# EAGLE board IR remote 2.1 (EAGLE 7.3.0)
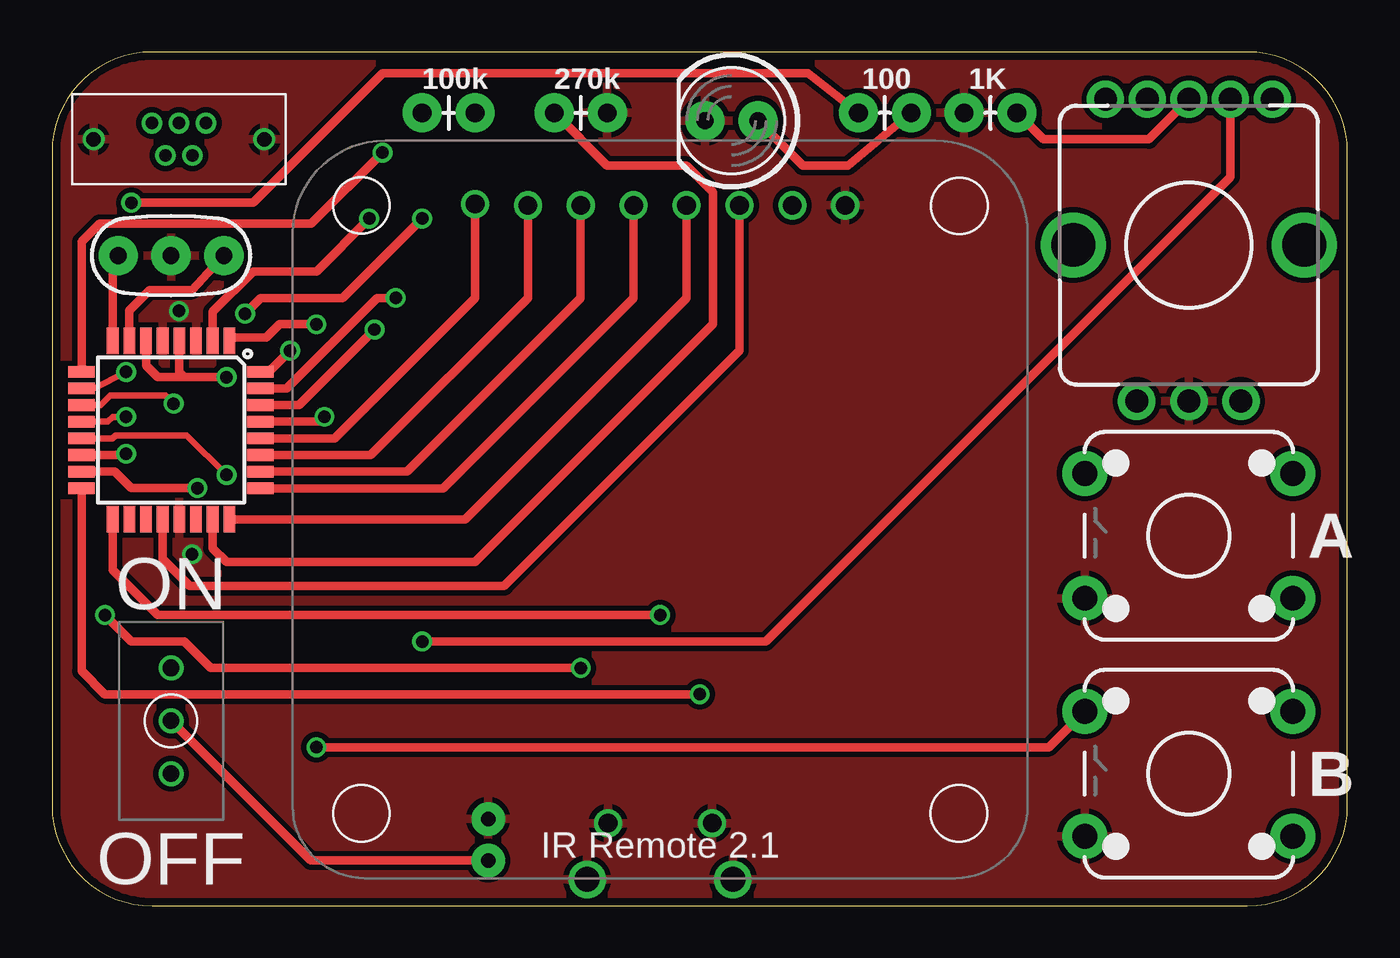
[diagram p0: board, top side]
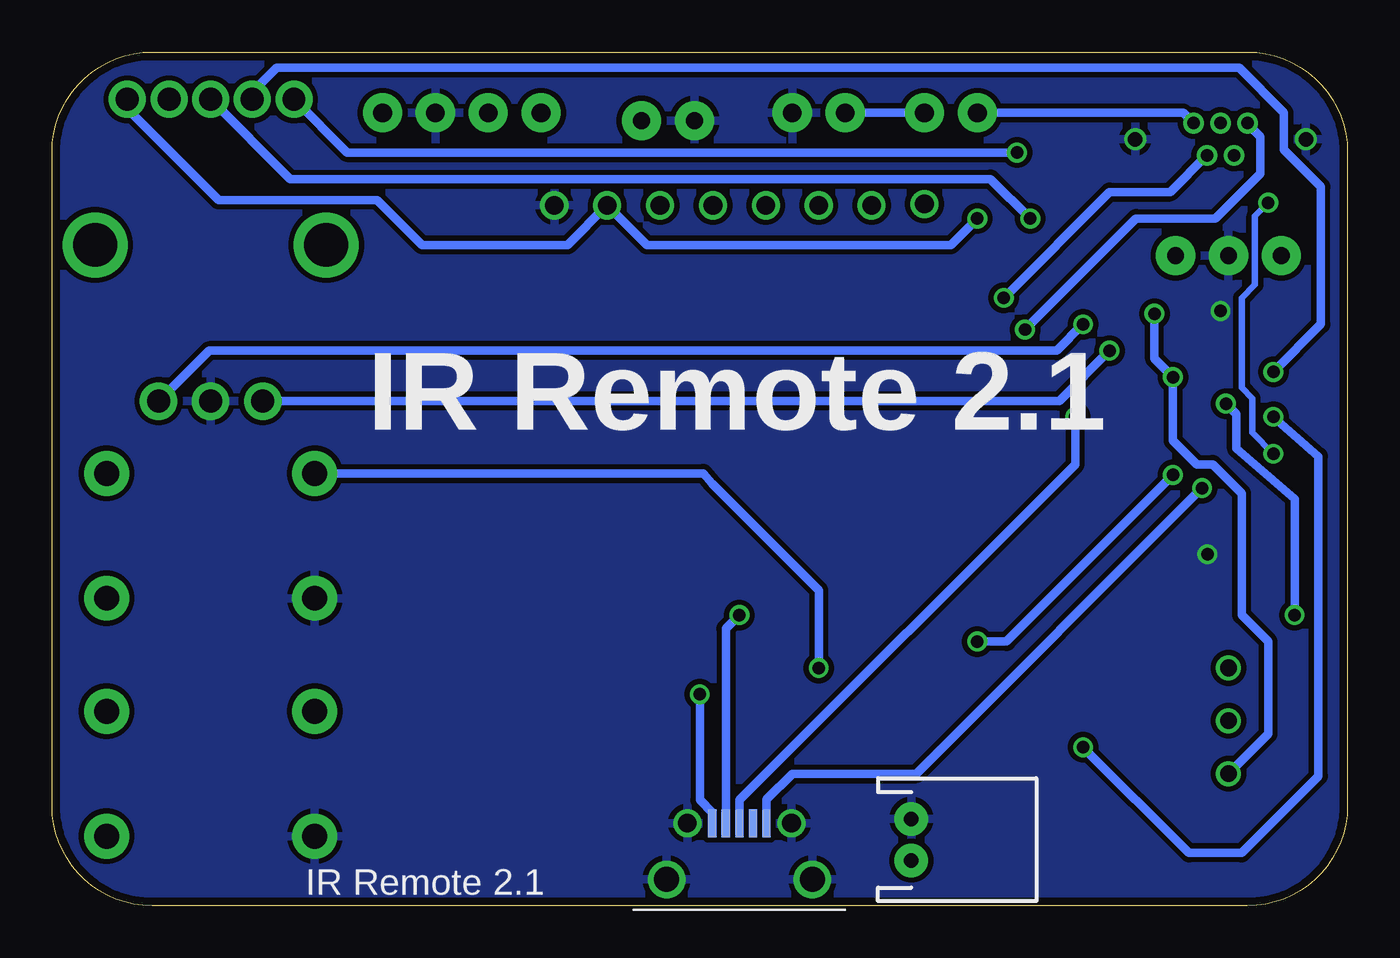
[diagram p1: board, bottom side, seen from below]

Size 62.23 x 41.02 mm. Coordinates in mm from the lower left corner, seen from the top.
Outline: 4.8,0 57.43,0 arc90 62.23,4.8 62.23,36.22 arc90 57.43,41.02 4.8,41.02 arc90 0,36.22 0,4.8 arc90 4.8,0
Copper layers (1*16): Top 0.0356mm / dielectric 1.5011mm / Bottom 0.0356mm
Design rules "LaenPCBOrder": minimum track width 6mil, minimum drill 13mil, track to track 6mil, track to pad 6mil, pad to pad 6mil, via to via 6mil, smd to smd 6mil, copper to edge 15mil, drill to drill 6mil, minimum pad ring 7mil, minimum via ring 7mil, stop-mask expansion 3mil, vias tented up to drill 0mil, thermal gap 10mil
Net classes: 0 default: clearance 0.254 mm

## Footprints (pad centres in the part's own frame; a part is rotated, then mirrored left to right if it is on the bottom)
USB_HORZ_REINFORCED_MICRO = drill 1.2: G1 -3.5,0; G2 3.5,0 | smd 0.4 x 1.35: P1 -1.3,2.7; P2 -0.65,2.7; P3 0,2.7; P4 0.65,2.7; P5 1.3,2.7 | drill 0.9: P$1 -2.5,2.7; P$2 2.5,2.7
JST-2-PTH = drill 0.7 pad 1.6: 1 -1,0; 2 1,0
LED5MM-KIT = drill 0.813 pad 1.88: A -1.27,0; K 1.27,0
MICRO-B-TH = drill 0.6 pad 1: 1 -1.3,-0.775; 2 -0.65,0.775; 3 0,-0.775; 4 0.65,0.775; 5 1.3,-0.775 | drill 0.7: P$1 -4.1,0; P$2 4.1,0
AXIAL-0.1 = drill 0.9 pad 1.88: P$1 0,0; P$2 2.54,0
TACTILE-PTH-12MM = drill 1.2 pad 2.159: 1 5,-3; 2 -5,-3; 3 5,3; 4 -5,3
TOGGLE = drill 0.8: P$1 0,2.54; P$2 0,0; P$3 0,-2.54
ENCODER_LED_3_KIT = drill 1.1 pad 1.778: 1 -4,7; 2 -2,7; 3 0,7; 4 2,7; 5 4,7 | drill 1.1 pad 1.8: A -2.5,-7.5; B 2.5,-7.5; C 0,-7.5 | drill 2.1: M1 -5.55,0; M2 5.55,0
TQFP32-08 = smd 1.27 x 0.559: 1 -4.293,2.8; 2 -4.293,2; 3 -4.293,1.2; 4 -4.293,0.4; 5 -4.293,-0.4; 6 -4.293,-1.2; 7 -4.293,-2; 8 -4.293,-2.8; 17 4.293,-2.8; 18 4.293,-2; 19 4.293,-1.2; 20 4.293,-0.4; 21 4.293,0.4; 22 4.293,1.2; 23 4.293,2; 24 4.293,2.8 | smd 0.559 x 1.27: 9 -2.8,-4.293; 10 -2,-4.293; 11 -1.2,-4.293; 12 -0.4,-4.293; 13 0.4,-4.293; 14 1.2,-4.293; 15 2,-4.293; 16 2.8,-4.293; 25 2.8,4.293; 26 2,4.293; 27 1.2,4.293; 28 0.4,4.293; 29 -0.4,4.293; 30 -1.2,4.293; 31 -2,4.293; 32 -2.8,4.293
OLED_DISPLAY = drill 0.9: 3V3 3.81,14.605; CLK -6.35,14.605; CS 1.27,14.605; DATA -8.89,14.668; DC -3.81,14.605; GND 8.89,14.605; RST -1.27,14.605; VIN 6.35,14.605
RESONATOR-PTH = drill 0.8 pad 1.88: 1 -2.54,0; 2 0,0; 3 2.54,0

## Placement (x,y rotation side)
ICSP_PORT  USB_SOCKET_MICRO_VERTREINFORCED  [USB_HORZ_REINFORCED_MICRO]  29.21,1.27 0 bottom
JP1  [JST-2-PTH]  20.95,3.17 270 bottom
LED1  [LED5MM-KIT]  32.64,37.72 180 top
PARAMETER_MONITOR  USB_MICROB_PLUG-PTH2  [MICRO-B-TH]  6.1,36.83 180 bottom
R1  1K  [AXIAL-0.1]  43.81,38.1 0 top
R2  270k  [AXIAL-0.1]  26.67,38.1 180 top
R3  100k  [AXIAL-0.1]  20.32,38.1 180 top
R5  100  [AXIAL-0.1]  38.73,38.1 0 top
S1  SWITCH-MOMENTARY-2-CLOSED  [TACTILE-PTH-12MM]  54.61,17.78 180 top
S3  SWITCH-MOMENTARY-2-CLOSED  [TACTILE-PTH-12MM]  54.61,6.35 180 top
S4  [TOGGLE]  5.71,8.89 180 top
SW1  [ENCODER_LED_3_KIT]  54.61,31.75 0 top
U2  ATMEGA328P_TQFP  [TQFP32-08]  5.71,22.86 270 top
U$1  OLED_DISPLAY  [OLED_DISPLAY]  29.21,19.05 0 top
Y1  [RESONATOR-PTH]  5.71,31.24 180 top

## Library data of the parts
ICSP_PORT PARAMETER_MONITOR S1 S3 S4 U$1 = Andy-library
JP1 = SparkFun-Connectors; PROD_ID: CONN-09863; SKU: PRT-09914
LED1 = SparkFun-LED
R1-R3 R5 = SparkFun-Resistors
SW1 = SparkFun-Electromechanical
U2 = SparkFun-DigitalIC; PROD_ID: IC-09069
Y1 = SparkFun-FreqCtrl

## Nets
3.3VDC: U2.20 U$1.3V3
BATT: JP1.2 S4.P$2
BLUE: SW1.4 U2.13
BTN: R1.P$2 SW1.3 U2.2
GND: ICSP_PORT.G1 ICSP_PORT.G2 ICSP_PORT.P$1 ICSP_PORT.P$2 JP1.1 LED1.K PARAMETER_MONITOR.P$1 PARAMETER_MONITOR.P$2 R1.P$1 R2.P$1 S1.3 S3.3 SW1.C U2.3 U2.5 U2.21 U$1.GND Y1.2
GREEN: SW1.2 U2.10
LED: R5.P$1 U2.14
N$1: PARAMETER_MONITOR.4 U2.31
N$2: U2.28 U$1.DATA
N$3: S1.1 U2.11
N$4: U2.27 U$1.CLK
N$5: U2.7 Y1.1
N$6: U2.8 Y1.3
N$7: U2.26 U$1.DC
N$8: U2.25 U$1.RST
N$9: U2.24 U$1.CS
N$10: SW1.B U2.1
N$11: SW1.A U2.32
N$12: PARAMETER_MONITOR.5 R3.P$2
N$13: LED1.A R5.P$2
N$14: PARAMETER_MONITOR.1 U2.30
N$16: R2.P$2 R3.P$1 U2.23
N$17: ICSP_PORT.P1 U2.16
N$18: ICSP_PORT.P2 U2.17
N$19: ICSP_PORT.P3 U2.29
N$20: ICSP_PORT.P5 U2.15
N$21: S3.1 U2.12
RED: SW1.1 U2.9
VIN: S4.P$1 SW1.5 U2.4 U2.6 U$1.VIN

## Tracks (layer width: path | path; a pad name or v marks a point on that pad's centre or on a via)
3.3VDC
  Top 0.406: U2.20 5.32,16.66 6.6,15.37 21.72,15.37 33.02,26.67 U$1.3V3
BATT
  Top 0.406: S4.P$2 12.43,2.17 JP1.2
BLUE  (via drill 0.6)
  Top 0.305: U2.13 2.9,22.46 3.05,22.61 6.48,22.61 v8.38,20.7
  Top 0.406: v17.78,12.7 34.29,12.7 56.61,35.02 SW1.4
  Bottom 0.406: v8.38,20.7 16.38,12.7 v17.78,12.7
BTN  (via drill 0.6)
  Top 0.406: U2.2 7.71,28.54 9.65,30.48 12.7,30.48 v15.24,33.02 | SW1.3 52.69,36.83 47.62,36.83 R1.P$2
  Bottom 0.406: v15.24,33.02 17.14,34.92 50.78,34.92 SW1.3
GND  (via drill 0.6)
  other vias: 6.1,28.57 6.73,16.89
  pour Bottom: -2.54,45.72 66.04,45.72 66.04,-3.81 -2.54,-3.81
  pour Top: -3.81,43.18 63.5,43.18 63.5,-6.35 -3.81,-6.35
GREEN  (via drill 0.6)
  Top 0.305: U2.10 2,24.86 v3.56,25.65
  Bottom 0.406: v3.56,25.65 1.27,27.94 1.27,34.54 3.05,36.32 3.05,38.1 5.21,40.26 51.44,40.26 52.61,39.08 SW1.2
LED  (via drill 0.6)
  Top 0.406: U2.14 3.5,21.66 v3.56,21.72 | R5.P$1 36.32,40.01 15.88,40.01 9.65,33.78 v3.81,33.78
  Bottom 0.305: v3.56,21.72 4.57,22.73 4.57,24.38 5.08,24.89 5.08,29.21 4.45,29.84 4.45,33.15 v3.81,33.78
N$1  (via drill 0.6)
  Top 0.406: U2.31 11.27,24.86 15.62,29.21 v16.51,29.21
  Bottom 0.406: v16.51,29.21 11.43,34.29 8.51,34.29 PARAMETER_MONITOR.4
N$2
  Top 0.406: U$1.DATA 20.32,29.21 13.57,22.46 U2.28
N$3  (via drill 0.6)
  Top 0.305: U2.11 2.34,24.06 2.79,24.51 5.46,24.51 v5.84,24.13
  Top 0.406: v2.54,13.97 3.81,12.7 6.35,12.7 7.62,11.43 v25.4,11.43
  Bottom 0.406: S1.1 30.94,20.78 30.52,20.28 25.4,15.16 v25.4,11.43 | v2.54,13.97 2.54,19.56 5.33,21.97 5.33,23.62 v5.84,24.13
N$4
  Top 0.406: U2.27 15.31,21.66 22.86,29.21 U$1.CLK
N$5
  Top 0.406: U2.7 3.71,28.61 4.7,29.59 6.73,29.59 Y1.1
N$6
  Top 0.406: U2.8 2.92,30.86 Y1.3
N$7
  Top 0.406: U2.26 17.05,20.86 25.4,29.21 U$1.DC
N$8
  Top 0.406: U2.25 18.79,20.06 27.94,29.21 U$1.RST
N$9
  Top 0.406: U2.24 19.84,18.57 30.48,29.21 U$1.CS
N$10  (via drill 0.6)
  Top 0.406: U2.1 8.67,27.3 10.29,27.3 10.92,27.94 v12.7,27.94
  Bottom 0.406: v12.7,27.94 13.97,26.67 54.69,26.67 SW1.B
N$11  (via drill 0.6)
  Top 0.406: U2.32 10.42,25.66 v11.43,26.67
  Bottom 0.406: v11.43,26.67 13.85,24.25 SW1.A
N$12
  Bottom 0.406: R3.P$2 7.89,38.1 PARAMETER_MONITOR.5
N$13
  Top 0.406: LED1.A 36.07,35.56 38.23,35.56 R5.P$2
N$14  (via drill 0.6)
  Top 0.406: v15.49,27.69 11.87,24.06 U2.30
  Bottom 0.406: v15.49,27.69 10.16,33.02 6.35,33.02 4.19,35.18 4.19,36.96 4.8,37.56 PARAMETER_MONITOR.1
N$16
  Top 0.406: U2.23 7.71,17.18 8.38,16.51 20.32,16.51 31.75,27.94 31.75,34.29 30.48,35.56 26.67,35.56 R2.P$2
  Bottom 0.406: R3.P$1 R2.P$2
N$17  (via drill 0.6)
  Top 0.406: U2.16 1.42,11.28 2.54,10.16 v31.11,10.16
  Bottom 0.406: v31.11,10.16 31.11,5.08 30.51,4.47 ICSP_PORT.P1
N$18  (via drill 0.6)
  Top 0.406: U2.17 2.92,16.14 5.08,13.97 v29.21,13.97
  Bottom 0.406: v29.21,13.97 29.86,13.32 ICSP_PORT.P2
N$19  (via drill 0.6)
  Top 0.406: U2.29 12.85,23.26 v13.08,23.5
  Bottom 0.406: ICSP_PORT.P3 29.21,5.08 13.08,21.21 v13.08,23.5
N$20  (via drill 0.6)
  Top 0.406: U2.15 3.02,20.86 3.81,20.07 v6.99,20.07
  Bottom 0.406: ICSP_PORT.P5 27.91,5.11 26.67,6.35 20.7,6.35 v6.99,20.07
N$21  (via drill 0.6)
  Top 0.305: U2.12 2.69,23.26 2.92,23.5 v3.56,23.5
  Top 0.406: v12.7,7.62 47.88,7.62 S3.1
  Bottom 0.406: v3.56,23.5 1.4,21.59 1.4,6.22 5.08,2.54 7.62,2.54 v12.7,7.62
RED  (via drill 0.6)
  Top 0.406: U2.9 1.42,31.9 2.29,32.77 12.45,32.77 v15.88,36.2
  Bottom 0.406: SW1.1 48.05,36.2 v15.88,36.2
VIN  (via drill 0.6)
  Top 0.406: U2.6 4.51,25.96 5.08,25.4 6.35,25.4 | U2.4 6.12,25.64 6.35,25.4 | 6.35,25.4 v8.38,25.4 | v9.27,28.45 10.03,29.21 13.97,29.21 v17.78,33.02
  Bottom 0.406: v9.27,28.45 9.27,26.29 v8.38,25.4 8.38,22.35 7.24,21.21 6.48,21.21 5.08,19.81 5.08,13.97 3.81,12.7 3.81,8.26 S4.P$1 | v17.78,33.02 19.05,31.75 33.66,31.75 U$1.VIN 37.47,31.75 44.45,31.75 46.61,33.91 54.23,33.91 58.61,38.29 SW1.5

## Text on the board
tNames: A | ON | B | IR Remote 2.1 | OFF
bNames: IR Remote 2.1 | IR Remote 2.1